# EAGLE board board1616_1servo_small (EAGLE 9.6.2)
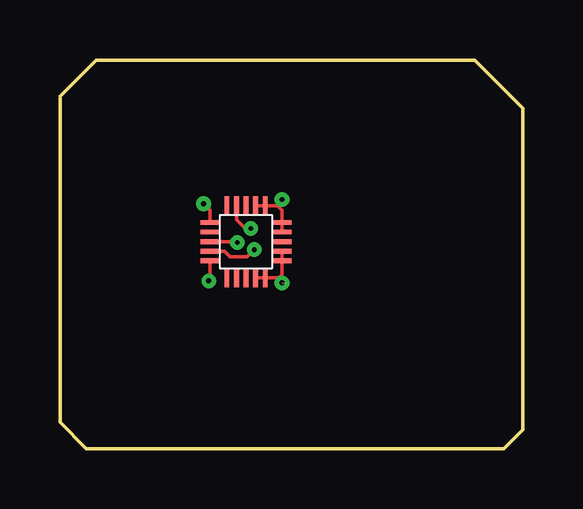
[diagram p0: board, top side]
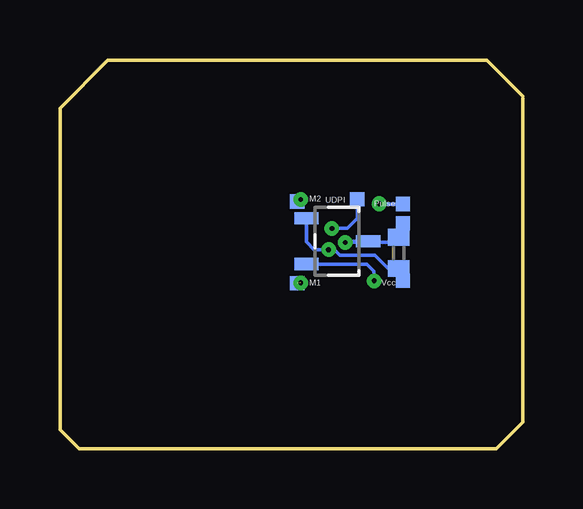
[diagram p1: board, bottom side, seen from below]

Size 19.3 x 16.2 mm. Coordinates in mm from the lower left corner, seen from the top.
Outline: 0,14.6 0,1.1 1.1,0 18.5,0 19.3,0.8 19.3,14.2 17.3,16.2 1.5,16.2 0,14.7
Copper layers (1*16): Top 0.035mm / dielectric 1.5mm / Bottom 0.035mm
Design rules "default": minimum track width 6mil, minimum drill 0.35mm, track to track 6mil, track to pad 6mil, pad to pad 6mil, via to via 6mil, smd to smd 6mil, copper to edge 40mil, drill to drill 6mil, minimum pad ring 10mil, minimum via ring 8mil, stop-mask expansion 4mil, vias tented up to drill 0mil, thermal gap 10mil

## Footprints (pad centres in the part's own frame; a part is rotated, then mirrored left to right if it is on the bottom)
C0402 = smd 0.7 x 0.9: 1 -0.65,0; 2 0.65,0
TP06SQ = smd 0.6 x 0.6: TP 0,0
SOT23-W = smd 0.508 x 1.016: 1 -0.953,-1.27; 2 0.953,-1.27; 3 0,1.3
QFN203X3 = smd 0.8 x 0.2: 1 -0.6,-0.1; 2 -0.6,-0.5; 3 -0.6,-0.9; 4 -0.6,-1.3; 5 -0.6,-1.7; 11 2.4,-1.7; 12 2.4,-1.3; 13 2.4,-0.9; 14 2.4,-0.5; 15 2.4,-0.1 | smd 0.2 x 0.8: 6 0.1,-2.4; 7 0.5,-2.4; 8 0.9,-2.4; 9 1.3,-2.4; 10 1.7,-2.4; 16 1.7,0.6; 17 1.3,0.6; 18 0.9,0.6; 19 0.5,0.6; 20 0.1,0.6

## Placement (x,y rotation side)
C1  [C0402]  5.18,8.16 270 bottom
GND  TPTP06SQ  [TP06SQ]  5,9.4 0 bottom
IC1  A1302LH  [SOT23-W]  7.75,8.65 270 bottom
SERVOIN  TPTP06SQ  [TP06SQ]  5,10.2 0 bottom
TP2  TPTP06SQ  [TP06SQ]  5,7 0 bottom
TP3  TPTP06SQ  [TP06SQ]  9.4,10.3 0 bottom
TP4  TPTP06SQ  [TP06SQ]  9.4,6.9 0 bottom
TP5  TPTP06SQ  [TP06SQ]  6.9,10.4 0 bottom
U$1  ATTINY1616  [QFN203X3]  6.86,9.53 0 top

## Library data of the parts
C1 = rcl; SPICEPREFIX: C
GND SERVOIN TP2-TP5 = testpad
IC1 = allegro; MF: ALLEGRO MICROSYSTEMS, INC.; MPN: A1302ELHLT-T; OC_FARNELL: 1457209; OC_NEWARK: 31K6638
U$1 = atmel_tiny24-44-84tiny48-88mega48-88-168-328

## Nets
N$1: TP4.TP U$1.9 U$1.10 U$1.11 U$1.12
N$2: SERVOIN.TP U$1.1
N$3: TP3.TP U$1.14 U$1.15 U$1.16 U$1.17
N$4: C1.1 GND.TP IC1.3 U$1.3
N$6: IC1.2 U$1.5
N$7: TP5.TP U$1.19
N$8: C1.2 IC1.1 TP2.TP U$1.4

## Tracks (layer width: path | path; a pad name or v marks a point on that pad's centre or on a via)
N$1  (via drill 0.2)  (1 unrouted)
  Top 0.152: U$1.9 U$1.10 9.04,7.13 | 9.04,7.13 9.13,7.13 9.26,7.26 U$1.11 U$1.12 | 9.04,7.13 v9.26,6.91
N$2  (via drill 0.2)
  Top 0.152: U$1.1 6.26,9.94 v5.99,10.21
  Bottom 0.127: SERVOIN.TP
  Bottom 0.152: v5.99,10.21 v5.98,10.2 SERVOIN.TP
N$3  (via drill 0.2)
  Top 0.152: U$1.14 U$1.15 9.26,9.94 9.15,10.05 | 9.15,10.05 9.07,10.13 U$1.16 U$1.17 | 9.15,10.05 9.15,10.28 v9.26,10.39
  Bottom 0.152: TP3.TP 9.31,10.39 v9.26,10.39
  Bottom 0.2: 9.34,10.36 TP3.TP
N$4  (via drill 0.2)
  Top 0.152: v7.4,8.6 7.37,8.63 U$1.3
  Bottom 0.152: 5.2,9.2 GND.TP 5.18,9.22 C1.1 5.39,8.6 v7.4,8.6 7.35,8.65 IC1.3
N$6  (via drill 0.2)
  Top 0.152: U$1.5 6.26,7.06 v6.2,7
  Bottom 0.152: IC1.2 6.5,7.7 6.2,7.4 v6.2,7
N$7  (via drill 0.2)
  Top 0.152: U$1.19 7.36,9.54 7.72,9.18 v7.96,9.18
  Bottom 0.152: v7.96,9.18 7.32,9.18 6.9,9.6 TP5.TP
N$8  (via drill 0.2)
  Top 0.152: U$1.4 6.87,8.23 7.1,8 7.8,8 v8.1,8.3
  Bottom 0.152: TP2.TP 5,7.33 C1.2 5.61,7.51 6.17,8.07 7.62,8.07 7.85,8.3 v8.1,8.3 8.7,8.3 9.02,8.62 IC1.1

## Text on the board
bNames: UDPI | Pulse | M2 | Vcc | M1
bDocu: GND